# Altium PCB SFCslaver.PcbDoc (part 5 of 6)
Units mm, origin at the board's own origin, x right, y up, seen from the top; angles counter-clockwise.
Board outline 149.66 x 75.74 mm, 2 copper layers (Top Layer, Bottom Layer); 284 components, 212 nets, 830 pads, 310 vias.
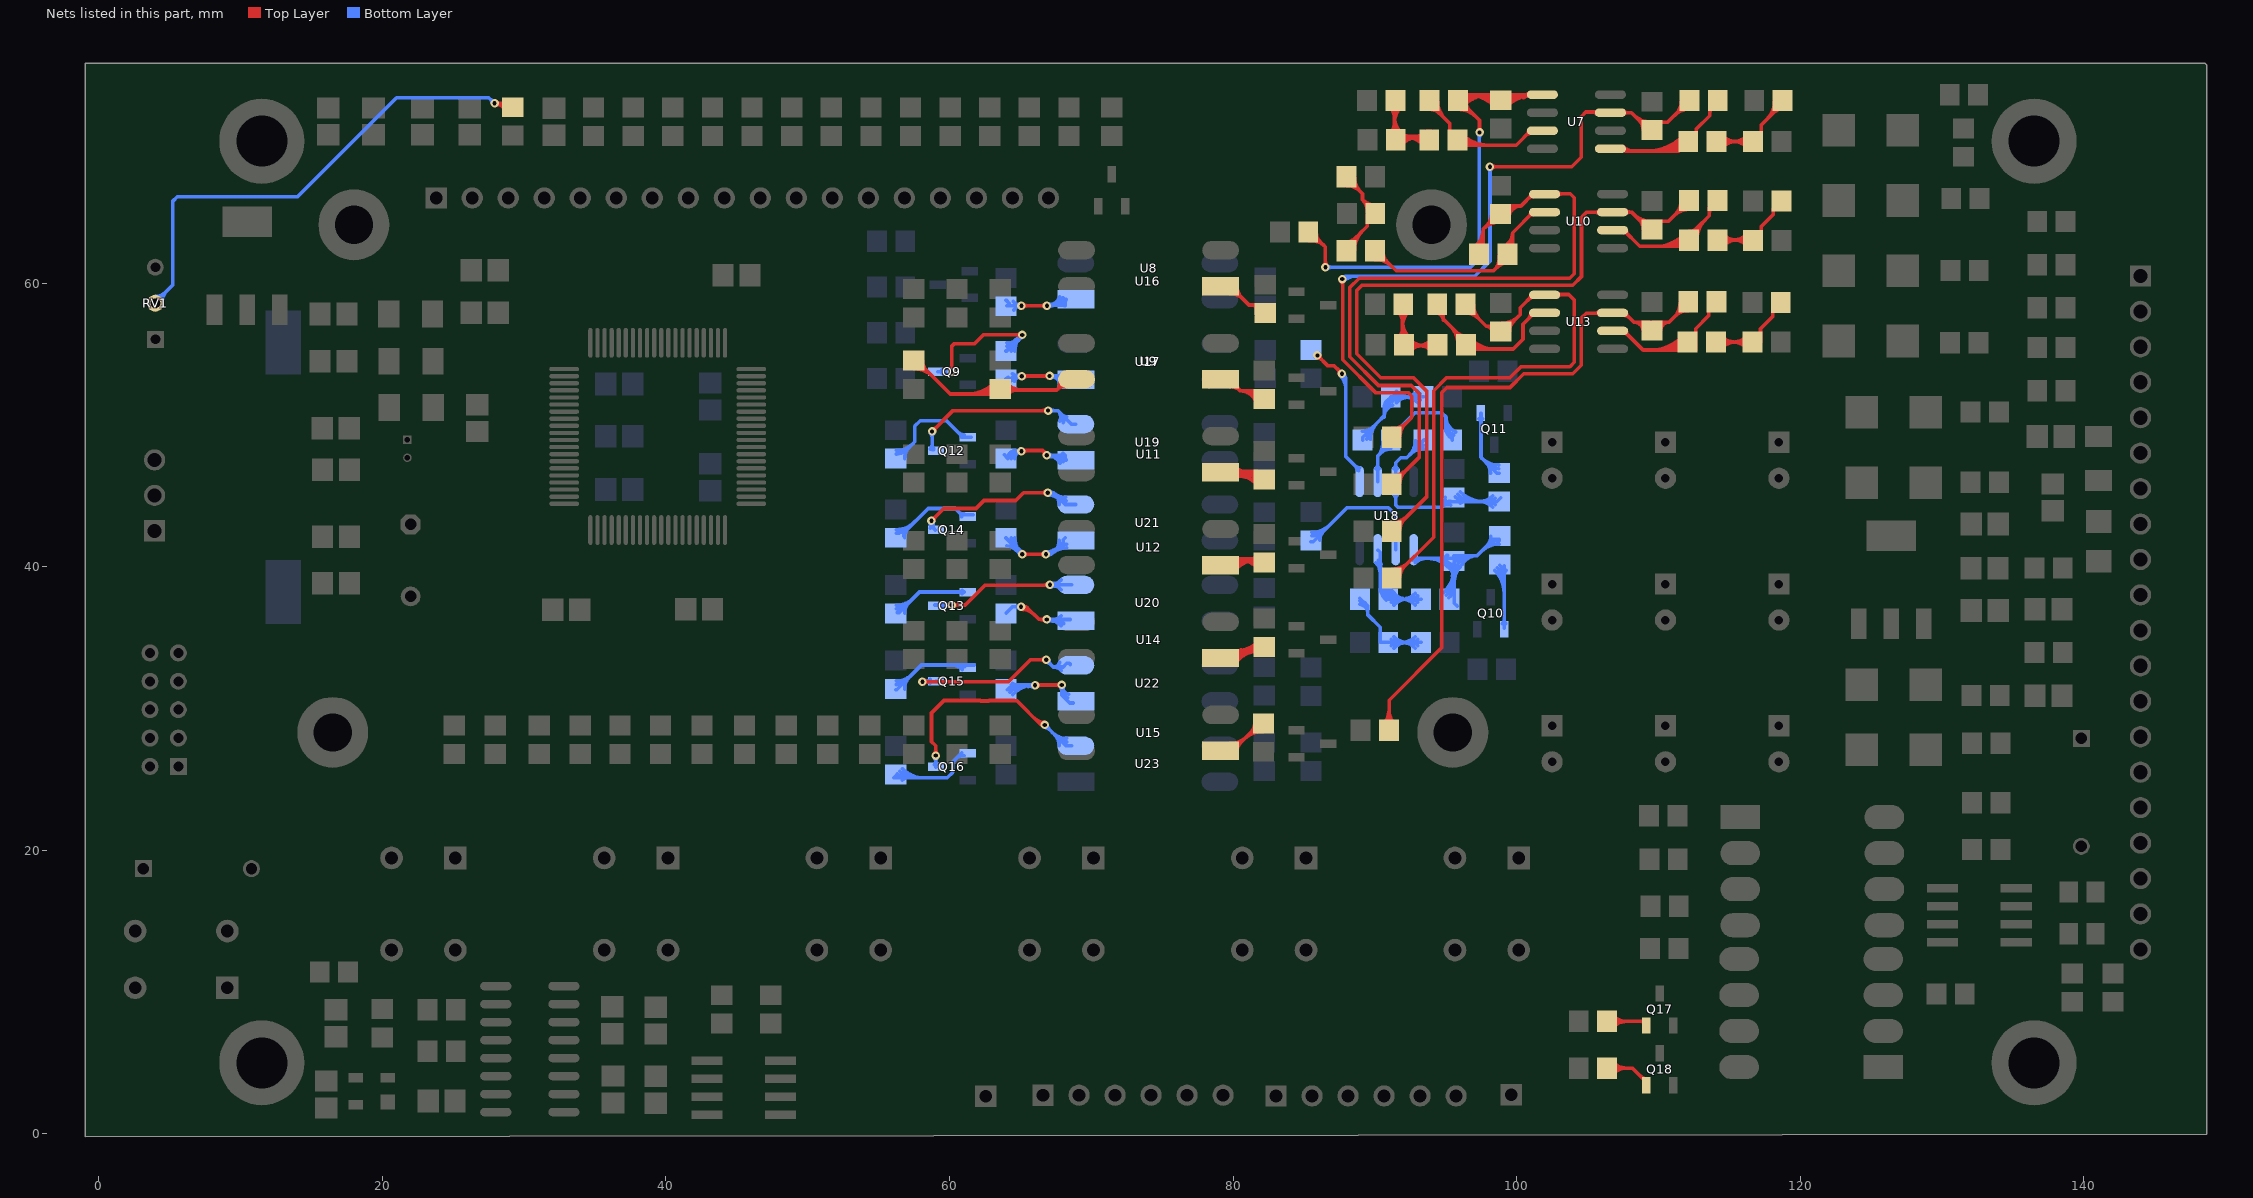
[diagram p5: the nets of this part, all layers, seen from the top]

## Via types
v1: diameter 0.6, hole 0.3, Top Layer to Bottom Layer, 310 vias

## Nets (pads, with @x,y where several pads share a name; then routed paths per layer and width w, separated by ;. In a path a pad name is that pad's centre, name@x,y a point inside that pad or via, vN(x,y) a via of type N, cw(c..) or ccw(c..) an arc to the next point about the centre after c; other vN are vias at no path point) (continued)
NetQ9_3: Q9.3 R106.1 | length 17.5
  Top Layer w0.254: v1@60.025,53.869 ccw(c59.73,54.164) 60.147,54.164 ccw(c60.565,54.164) v1@60.27,53.869 ; v1(60.147,53.746) 60.147,55.524 60.35,55.728 61.773,55.728 62.382,56.337 v1@65.1,56.337 ; v1@65.003,56.215 ccw(c64.708,55.92) 64.708,56.337 ccw(c64.708,56.755) v1@65.003,56.46
  Bottom Layer w0.254: Q9.3@59.176,53.746 v1(60.147,53.746) ; Q9.3@59.447,53.635 cw(c59.715,53.368) 59.715,53.746 ; Q9.3@59.447,53.88 ccw(c59.77,54.203) 59.77,53.746 ; v1@60.025,53.624 ccw(c59.73,53.329) 59.73,53.746 ccw(c59.73,54.164) v1@60.025,53.869 ; R106.1@63.984,55.208 64.022,55.208 65.126,56.312 v1(65.126,56.337) v1@65.126,56.363 ; R106.1@64.034,55.527 ccw(c64.034,56.266) R106.1@64.557,55.743 ; R106.1@64.034,55.781 ccw(c64.034,57.133) v1@64.991,56.177 ; R106.1@64.353,55.208 cw(c65.154,55.208) R106.1@64.588,55.774 ; R106.1@64.607,55.208 cw(c66.022,55.208) v1@65.022,56.208 ; 64.65,55.98 ccw(c64.32,56.553) v1@64.958,56.382 ; 64.812,55.999 ccw(c64.474,56.337) v1@64.953,56.337 ; 64.864,55.935 cw(c65.301,55.683) v1@65.17,56.17 ; 64.874,56.06 cw(c65.126,55.808) v1@65.126,56.164 ; 64.925,56.041 ccw(c64.639,56.207) v1@64.958,56.292
NetQ10_1: Q10.1 R37.1 | length 9.4
  Bottom Layer w0.254: R37.1@98.451,39.743 cw(c96.833,38.125) 99.121,38.125 ; R37.1@98.63,39.922 cw(c97.446,38.738) 99.121,38.738 ; R37.1@98.81,40.102 cw(c98.059,39.351) 99.121,39.351 ; Q10.1@98.999,35.975 ccw(c98.703,36.271) 99.121,36.271 ccw(c99.539,36.271) Q10.1@99.243,35.975 ; Q10.1@99.121,35.653 R37.1@99.121,40.041 ; 99.121,39.404 cw(c99.6,39.404) R37.1@99.261,39.743
NetQ11_1: Q11.1 R38.2 | length 8.6
  Bottom Layer w0.254: Q11.1@97.349,50.44 cw(c97.019,50.11) 97.485,50.11 ; 97.485,50.179 cw(c97.854,50.179) Q11.1@97.593,50.44 ; Q11.1@97.485,50.825 97.485,47.701 98.593,46.593 R38.2@98.781,46.593 ; 97.518,47.668 ccw(c98.731,48.881) R38.2@98.731,47.166 ; 97.849,47.337 cw(c97.105,46.593) R38.2@98.158,46.593 ; 97.952,47.235 ccw(c98.731,48.013) R38.2@98.731,46.912
NetQ12_1: Q12.1 R122.2 | length 10.8
  Bottom Layer w0.254: R122.2@56.262,47.939 ccw(c56.262,48.995) 57.009,48.248 ; R122.2@56.262,48.193 ccw(c56.262,49.862) 57.442,48.682 ; R122.2@56.835,47.62 cw(c57.932,47.62) 57.156,48.396 ; R122.2@56.872,47.705 56.872,48.112 57.556,48.796 57.556,49.911 57.937,50.292 59.792,50.292 60.956,49.128 Q12.1@61.544,49.128 ; 60.626,49.458 ccw(c61.024,49.857) Q12.1@61.024,49.293 ; Q12.1@60.772,49.312 cw(c60.58,49.12) Q12.1@60.851,49.12
NetQ12_3: Q12.3 U19.2 | length 17.6
  Top Layer w0.254: v1(58.776,49.53) 60.249,51.003 v1@66.98,51.003 ; v1@58.776,49.703 ccw(c58.776,50.121) 59.071,49.825 ccw(c59.366,49.53) v1@58.949,49.53 ; v1@66.832,50.881 ccw(c66.537,50.586) 66.537,51.003 ccw(c66.537,51.421) v1@66.832,51.126
  Bottom Layer w0.254: Q12.3@58.652,48.292 ccw(c58.354,48.59) 58.776,48.59 ; v1@58.653,49.408 cw(c58.358,49.112) 58.776,49.112 cw(c59.193,49.112) v1@58.898,49.408 ; 58.776,48.585 ccw(c59.189,48.585) Q12.3@58.897,48.292 ; v1(58.776,49.53) 58.776,48.26 58.801,48.235 Q12.3@58.9,48.235 ; v1(66.954,51.003) 67.646,51.003 ; v1@67.077,50.881 cw(c67.372,50.586) 67.372,51.003 cw(c67.372,51.421) v1@67.077,51.126 ; U19.2@67.784,50.263 ccw(c67.176,50.533) 67.646,51.003 ; 67.908,50.741 cw(c67.538,50.372) U19.2@68.016,50.16 ; 67.944,50.705 ccw(c68.262,51.023) U19.2@68.262,50.574 ; U19.2@68.887,50.042 68.607,50.042 67.646,51.003
NetQ13_1: Q13.1 R123.2 | length 9
  Bottom Layer w0.254: R123.2@56.262,37.017 ccw(c56.262,38.073) 57.009,37.326 ; R123.2@56.262,37.271 ccw(c56.262,38.94) 57.442,37.76 ; R123.2@56.314,36.758 56.441,36.758 57.888,38.206 Q13.1@61.053,38.206 ; R123.2@56.835,36.698 cw(c57.932,36.698) 57.156,37.474 ; 60.587,38.206 cw(c60.587,37.761) Q13.1@60.902,38.075 ; 60.626,38.206 ccw(c60.626,38.596) Q13.1@60.902,38.32
NetQ13_3: Q13.3 U20.2 | length 16.7
  Top Layer w0.254: v1(60.147,37.287) 61.11,37.287 62.507,38.684 63.246,38.684 63.25,38.688 v1@67.134,38.688 ; v1@60.27,37.165 cw(c60.565,36.87) 60.565,37.287 cw(c60.565,37.705) v1@60.27,37.41 ; 66.604,38.688 ccw(c66.604,39.193) v1@66.961,38.836 ; 66.727,38.688 cw(c66.727,38.357) v1@66.961,38.591
  Bottom Layer w0.254: Q13.3@58.953,37.262 58.979,37.287 v1(60.147,37.287) ; Q13.3@59.447,37.125 cw(c59.837,36.735) 59.837,37.287 ; Q13.3@59.447,37.37 ccw(c59.647,37.57) 59.647,37.287 ; v1@60.025,37.165 ccw(c59.73,36.87) 59.73,37.287 ccw(c59.73,37.705) v1@60.025,37.41 ; v1@67.17,38.564 cw(c67.379,38.202) 67.487,38.606 cw(c67.595,39.009) v1@67.233,38.8 ; v1@67.17,38.864 ccw(c67.379,39.225) 67.487,38.822 ccw(c67.595,38.418) v1@67.233,38.627 ; v1@67.206,38.591 cw(c67.501,38.296) 67.501,38.714 cw(c67.501,39.131) v1@67.206,38.836 ; U20.2@67.87,38.359 ccw(c67.083,37.664) v1(67.083,38.714) ; U20.2@67.878,39.061 cw(c67.083,39.798) v1(67.083,38.714) ; U20.2@68.633,38.714 v1(67.083,38.714)
NetQ14_1: Q14.1 R128.2 | length 9.8
  Bottom Layer w0.254: R128.2@56.262,42.351 ccw(c56.262,43.529) 57.095,42.696 ; R128.2@56.262,42.605 ccw(c56.262,44.397) 57.529,43.13 ; R128.2@56.796,42.143 56.796,42.397 58.494,44.094 60.401,44.094 60.829,43.667 Q14.1@61.671,43.667 ; R128.2@56.835,42.032 cw(c57.81,42.032) 57.121,42.721 ; 60.626,43.87 ccw(c61.024,44.269) Q14.1@61.024,43.705 ; Q14.1@60.772,43.724 cw(c60.58,43.532) Q14.1@60.851,43.532
NetQ14_3: Q14.3 U21.2 | length 20.9
  Top Layer w0.254: v1@58.725,43.404 ccw(c58.725,43.821) 59.02,43.526 ccw(c59.315,43.231) v1@58.898,43.231 ; v1@58.727,43.233 59.593,44.099 61.876,44.099 62.435,44.657 64.673,44.657 65.227,45.212 v1(66.929,45.212) ; v1@66.807,45.09 ccw(c66.511,44.794) 66.511,45.212 ccw(c66.511,45.63) v1@66.807,45.334
  Bottom Layer w0.254: v1@58.611,43.101 cw(c58.392,42.85) Q14.3@58.725,42.85 ; v1@58.638,43.081 cw(c58.479,42.805) 58.787,42.887 ; v1@58.65,43.262 ccw(c59.009,43.114) Q14.3@58.734,42.84 ; Q14.3@58.652,42.704 ccw(c58.476,42.88) Q14.3@58.725,42.88 ; v1@58.725,43.119 ccw(c59.312,43.119) Q14.3@58.897,42.704 ; v1(58.725,43.231) Q14.3@58.725,42.85 ; Q14.3@58.79,42.874 cw(c59.034,42.939) v1@58.851,43.112 ; v1@58.839,43.101 ccw(c59.058,42.85) Q14.3@58.725,42.85 ; v1@58.885,43.165 ccw(c59.391,42.957) 59.004,42.57 Q14.3@58.725,42.85 ; v1@66.929,45.039 cw(c66.929,43.64) U21.2@67.918,44.629 ; v1@66.929,45.293 cw(c66.929,44.507) 67.484,45.063 ; v1@66.969,45.212 67.335,45.212 ; v1@67.054,45.092 cw(c67.335,44.821) 67.335,45.212 ; v1@67.054,45.332 ccw(c67.335,45.603) 67.335,45.212 ; 67.435,45.113 cw(c66.7,44.378) U21.2@67.739,44.378 ; 67.715,44.832 ccw(c68.173,45.289) U21.2@68.236,44.646 ; U21.2@68.211,44.898 cw(c68.105,45.981) 67.335,45.212 ; U21.2@68.887,44.378 68.169,44.378 67.335,45.212
NetQ15_1: Q15.1 R131.2 | length 10.4
  Bottom Layer w0.254: R131.2@56.212,31.322 56.288,31.322 58.026,33.06 Q15.1@61.732,33.06 ; R131.2@56.262,31.683 ccw(c56.262,32.616) R131.2@56.922,31.956 ; R131.2@56.262,31.937 ccw(c56.262,33.483) 57.356,32.39 ; R131.2@56.835,31.364 cw(c58.055,31.364) 57.192,32.227 ; 60.134,33.06 cw(c60.134,31.973) Q15.1@60.902,32.741 ; Q15.1@60.747,33.06 cw(c60.747,32.586) Q15.1@61.082,32.921
NetQ15_3: Q15.3 U22.2 | length 17.3
  Top Layer w0.254: v1(58.09,31.877) 64.16,31.877 65.71,33.426 v1@66.878,33.426 ; v1@58.212,31.755 cw(c58.507,31.459) 58.507,31.877 cw(c58.507,32.295) v1@58.212,31.999 ; v1@66.705,33.304 ccw(c66.41,33.009) 66.41,33.426 ccw(c66.41,33.844) v1@66.705,33.549
  Bottom Layer w0.254: v1@58.064,31.877 59.013,31.877 Q15.3@59.049,31.914 ; v1@58.212,31.755 cw(c58.507,31.459) 58.507,31.877 cw(c58.507,32.295) v1@58.212,31.999 ; v1@58.214,31.998 ccw(c58.396,32.175) 58.462,31.929 ; v1@58.24,31.791 cw(c58.465,31.66) 58.398,31.912 ; v1@58.268,31.877 ccw(c58.268,32.42) Q15.3@58.652,32.036 ; 58.446,31.877 cw(c58.446,31.585) Q15.3@58.652,31.791 ; v1@66.827,33.253 cw(c66.827,32.897) 67.079,33.149 ; v1@66.992,33.236 67.31,32.918 ; v1@67,33.426 ccw(c67.479,33.426) 67.141,33.088 ; U22.2@67.778,33.232 cw(c67.31,33.425) 67.31,32.918 ; U22.2@67.883,32.672 ccw(c67.31,32.128) 67.31,32.918 ; U22.2@68.531,33.126 68.531,33.075 68.434,33.172 68.275,33.172 68.021,32.918 67.31,32.918
  other v1: 66.827,33.426
NetQ16_1: Q16.1 R135.2 | length 11.1
  Bottom Layer w0.254: R135.2@56.301,25.315 56.085,25.099 59.844,25.099 60.225,25.48 60.225,26.217 Q16.1@60.86,26.852 ; R135.2@56.308,25.39 ccw(c57.009,26.091) 57.009,25.099 ; R135.2@56.488,25.57 ccw(c57.623,26.705) 57.623,25.099 ; R135.2@56.667,24.939 cw(c57.055,24.551) 57.055,25.099 ; R135.2@56.667,25.749 ccw(c58.236,27.318) 58.236,25.099 ; 60.435,26.427 cw(c61.024,25.838) Q16.1@61.024,26.671
NetQ16_3: Q16.3 U23.2 | length 21.5
  Top Layer w0.254: v1@58.907,26.792 ccw(c58.612,27.088) 59.03,27.088 ccw(c59.447,27.088) v1@59.152,26.792 ; v1(59.03,26.67) 59.03,27.356 58.736,27.65 58.736,29.679 59.608,30.551 62.173,30.551 62.206,30.519 62.762,30.519 62.795,30.551 64.549,30.551 64.552,30.549 64.752,30.549 66.446,28.854 v1@66.685,28.854 ; 65.997,29.304 ccw(c66.726,30.033) v1@66.726,29.002
  Bottom Layer w0.254: v1@58.907,26.548 cw(c58.612,26.252) 59.03,26.252 cw(c59.447,26.252) v1@59.152,26.548 ; Q16.3@58.927,26.016 ccw(c58.68,26.264) 59.03,26.264 ; Q16.3@59.03,25.857 v1(59.03,26.67) ; 59.03,26.359 ccw(c59.515,26.359) Q16.3@59.172,26.016 ; v1@66.726,28.656 cw(c66.726,28.238) 67.021,28.534 cw(c67.316,28.829) v1@66.899,28.829 ; v1@66.751,28.804 68.195,27.36 U23.2@68.607,27.36 ; 67.254,28.3 ccw(c68.262,29.308) U23.2@68.262,27.883 ; 67.417,28.138 cw(c66.639,27.36) U23.2@67.739,27.36 ; 67.688,27.867 ccw(c68.262,28.441) U23.2@68.262,27.629
  other v1: 66.726,28.829
NetQ17_1: Q17.1 R158.2 | length 6.5
  Top Layer w0.254: R158.2@106.386,7.925 Q17.1@108.89,7.925 ; R158.2@106.612,7.699 cw(c107.157,7.155) 107.157,7.925 cw(c107.157,8.695) R158.2@106.612,8.15 ; R158.2@106.792,7.52 cw(c107.77,6.541) 107.77,7.925 cw(c107.77,9.308) R158.2@106.792,8.33 ; 108.713,7.925 cw(c108.713,7.467) Q17.1@109.037,7.791 ; 108.77,7.925 ccw(c108.77,8.302) Q17.1@109.037,8.035
NetQ18_1: Q18.1 R160.2 | length 7.5
  Top Layer w0.254: R160.2@106.386,4.627 108.174,4.627 109.195,3.607 Q18.1@109.195,3.378 ; R160.2@106.612,4.401 cw(c107.157,3.857) 107.157,4.627 cw(c107.157,5.397) R160.2@106.612,4.853 ; R160.2@106.792,4.222 cw(c107.77,3.244) 107.77,4.627 cw(c107.77,6.01) R160.2@106.792,5.032 ; 108.771,4.03 ccw(c109.159,4.418) Q18.1@109.159,3.87 ; Q18.1@108.902,3.899 cw(c108.699,3.697) Q18.1@108.986,3.697
NetR13_1: R13.1 RV1.2 | length 41.3
  Top Layer w0.254: v1@28.007,72.523 cw(c28.202,72.213) 28.297,72.567 cw(c28.392,72.921) v1@28.068,72.75 ; v1@28.037,72.547 cw(c28.332,72.252) 28.332,72.669 cw(c28.332,73.087) v1@28.037,72.792 ; 28.289,72.669 cw(c28.289,72.054) R13.1@28.861,72.281 ; 28.426,72.669 ccw(c28.426,73.131) R13.1@28.752,72.805 ; R13.1@28.625,72.187 ccw(c27.915,71.905) v1(27.915,72.669) R13.1@29.388,72.669
  Bottom Layer w0.254: RV1.2@3.937,58.572 5.232,59.868 5.232,65.786 5.537,66.091 14.021,66.091 21.006,73.076 27.508,73.076 v1(27.915,72.669) ; RV1.2@3.988,59.045 ccw(c3.988,60.065) 4.709,59.344 ; RV1.2@4.207,58.572 cw(c4.858,58.572) 4.398,59.033 ; RV1.2@4.461,58.572 cw(c5.725,58.572) 4.831,59.467 ; v1@27.742,72.669 ccw(c27.324,72.669) 27.619,72.965 ccw(c27.915,73.26) v1@27.915,72.842
NetR19_1: R19.1 R48.1 R50.2 U7.1 | length 57.2
  Top Layer w0.254: R19.1@85.319,63.754 86.512,62.56 ; R19.1@85.331,63.234 cw(c85.42,62.236) 86.128,62.945 ; R19.1@85.354,62.981 cw(c85.483,61.531) 86.512,62.56 ; R19.1@85.876,63.552 ccw(c86.732,63.552) 86.126,62.946 ; v1@86.39,61.235 ccw(c86.095,61.53) 86.512,61.53 ccw(c86.93,61.53) v1@86.635,61.235 ; v1@86.42,61.112 86.512,61.205 86.512,62.56 ; v1@86.487,61.087 v1(86.512,61.112) v1@86.525,61.125 ; R48.1@95.785,73.283 R48.1@96.023,73.283 ; R48.1@95.867,72.25 cw(c95.867,70.462) 97.131,71.726 ; R48.1@95.867,72.504 cw(c95.867,71.329) 96.697,72.16 ; R48.1@95.896,73.41 R48.1@96.023,73.283 ; R48.1@95.913,72.877 cw(c96.894,71.895) 96.894,73.283 ; R48.1@96.092,72.697 cw(c97.507,71.282) 97.507,73.283 ; R48.1@96.272,72.517 cw(c98.121,70.669) 98.121,73.283 ; R48.1@96.44,72.823 ccw(c97.418,72.823) 96.726,72.131 ; R48.1@96.492,73.283 cw(c96.492,70.544) R50.2@98.429,72.481 ; 97.105,73.283 cw(c97.105,71.158) R50.2@98.608,72.661 ; v1@97.263,70.739 ccw(c96.968,71.034) 97.385,71.034 ccw(c97.803,71.034) v1@97.508,70.739 ; v1@97.385,70.591 v1(97.385,70.616) 97.385,71.471 96.023,72.834 R48.1@96.023,73.283 ; 97.719,73.283 cw(c97.719,71.771) R50.2@98.788,72.84 ; R50.2@98.98,72.84 cw(c100.049,71.771) 100.049,73.283 ; R50.2@99.16,72.661 cw(c100.663,71.158) 100.663,73.283 ; R50.2@99.339,72.481 cw(c101.276,70.544) U7.1@101.276,73.283 ; 100.482,73.086 ccw(c100.33,73.697) U7.1@100.87,73.372 ; U7.1@100.896,73.161 ccw(c100.6,72.866) 100.6,73.283 ccw(c100.6,73.701) U7.1@100.896,73.406 ; U7.1@101.818,73.283 R48.1@96.023,73.283
  Bottom Layer w0.254: v1(86.512,61.112) 96.774,61.112 97.372,61.71 97.372,70.603 v1(97.385,70.616) v1@97.385,70.642 ; v1@86.635,60.99 cw(c86.93,60.695) 86.93,61.112 cw(c86.93,61.53) v1@86.635,61.235 ; v1@97.263,70.494 cw(c97,70.231) 97.372,70.231 ; 97.372,70.166 cw(c97.835,70.166) v1@97.508,70.494
NetR20_1: R20.1 R49.2 R51.1 U7.7 | length 66.9
  Top Layer w0.254: v1@87.584,60.152 cw(c87.227,59.795) 87.732,59.795 ; 87.732,59.918 cw(c88.063,59.918) v1@87.829,60.152 ; v1@87.732,60.274 87.732,54.591 90.05,52.273 92.354,52.273 92.608,52.019 92.608,50.521 R20.1@91.211,49.124 ; R20.1@91.195,49.486 ccw(c91.195,50.4) R20.1@91.842,49.754 ; R20.1@91.195,49.74 ccw(c91.195,51.268) 92.275,50.188 ; R20.1@91.768,49.167 cw(c93.008,49.167) 92.131,50.044 ; 98.857,68.199 v1(98.12,68.199) 103.884,68.199 104.548,68.864 104.548,71.731 104.881,72.064 U7.7@105.793,72.064 ; 105.278,72.064 cw(c105.278,71.473) U7.7@105.696,71.891 ; U7.7@106.618,72.013 108.096,72.013 108.76,71.349 ; U7.7@107.54,71.891 cw(c107.836,71.596) 107.836,72.013 cw(c107.836,72.431) U7.7@107.54,72.136 ; 108.231,71.878 ccw(c109.498,73.145) R51.1@109.498,71.353 ; 108.639,71.47 cw(c107.95,70.78) R51.1@108.925,70.78 ; 108.664,71.445 ccw(c109.498,72.278) R51.1@109.498,71.099 ; R51.1@108.929,70.853 ccw(c108.341,70.929) 108.76,71.349 ; R51.1@109.222,71.283 cw(c109.035,71.623) 108.76,71.349 ; 111.137,71.82 cw(c112.184,70.772) R49.2@112.184,72.254 ; 111.235,71.918 ccw(c110.326,72.827) R49.2@111.611,72.827 ; R49.2@111.57,72.254 cw(c112.184,71.64) R49.2@112.184,72.508 ; R49.2@111.668,72.352 ccw(c111.193,72.827) R49.2@111.865,72.827 ; R49.2@112.321,73.461 112.321,73.004 110.665,71.349 108.76,71.349 ; 98.538,68.199 ccw(c98.538,67.781) 98.243,68.077 cw(c98.538,67.781) 98.538,68.199 ; 98.538,68.199 cw(c98.538,68.617) 98.243,68.321 ccw(c98.538,68.617) 98.538,68.199
  Bottom Layer w0.254: v1@87.649,60.331 cw(c88.001,59.979) 88.001,60.477 ; v1@87.694,60.287 87.719,60.287 87.909,60.477 97.051,60.477 98.12,61.547 v1@98.12,68.174 ; v1@87.829,60.152 cw(c88.614,59.366) 88.614,60.477 ; v1@97.998,68.077 cw(c97.703,67.781) 98.12,67.781 cw(c98.538,67.781) v1@98.243,68.077
  other v1: 87.706,60.274
NetR21_1: R21.1 R69.2 R71.2 U10.1 | length 63.2
  Top Layer w0.254: R21.1@91.195,46.178 ccw(c91.195,47.138) R21.1@91.874,46.459 ; R21.1@91.195,46.432 ccw(c91.195,48.005) 92.308,46.893 ; R21.1@91.211,45.796 93.144,47.728 93.144,52.19 92.561,52.772 90.256,52.772 88.231,54.798 88.231,59.681 88.891,60.341 103.75,60.341 104.066,60.657 104.066,66.019 103.786,66.298 U10.1@102.516,66.298 ; R21.1@91.768,45.859 cw(c92.962,45.859) 92.118,46.703 ; R69.2@97.004,62.535 ccw(c96.048,63.807) 97.639,63.807 ; R69.2@97.157,62.332 ccw(c96.431,63.298) 97.639,63.298 ; R69.2@97.31,62.129 ccw(c96.813,62.789) 97.639,62.789 ; R69.2@97.639,62.31 97.639,63.807 ; R69.2@97.639,62.759 ccw(c98.031,62.759) R69.2@97.754,62.482 ; 97.908,64.075 ccw(c97.12,64.862) R71.2@98.234,64.862 ; 98.072,64.24 cw(c98.805,63.507) R71.2@98.806,64.543 ; R71.2@98.722,64.9 cw(c99.37,64.768) R71.2@99.37,65.43 ; R71.2@98.806,64.289 ccw(c98.804,62.642) 97.639,63.807 ; R71.2@98.971,64.849 cw(c99.681,64.705) 99.681,65.43 ; R71.2@99.219,64.799 cw(c99.992,64.643) 99.992,65.43 ; R71.2@99.468,64.749 cw(c100.302,64.58) 100.302,65.43 ; 100.831,65.959 cw(c101.17,65.62) U10.1@101.17,66.1 ; 100.893,66.022 ccw(c100.642,66.273) U10.1@100.997,66.273 ; U10.1@101.97,66.273 101.145,66.273 100.302,65.43 ; U10.1@102.893,66.15 cw(c103.249,65.794) 103.249,66.298 ; U10.1@102.893,66.395 ccw(c103.127,66.629) 103.127,66.298 ; 97.639,63.807 99.263,65.43 100.302,65.43
NetR22_1: R22.1 R70.2 R72.1 U10.7 | length 62.9
  Top Layer w0.254: R22.1@91.195,42.87 ccw(c91.195,43.876) 91.907,43.164 ; R22.1@91.195,43.124 ccw(c91.195,44.743) 92.34,43.598 ; R22.1@91.211,42.469 93.65,44.907 93.65,52.389 92.724,53.315 90.42,53.315 88.73,55.005 88.73,59.474 89.098,59.842 103.957,59.842 104.574,60.459 104.574,64.647 104.904,64.977 U10.7@106.783,64.977 ; R22.1@91.768,42.551 cw(c92.916,42.551) 92.104,43.362 ; 105.491,64.977 ccw(c105.491,65.482) U10.7@105.848,65.125 ; 105.614,64.977 cw(c105.614,64.646) U10.7@105.848,64.88 ; U10.7@106.77,65.003 108.104,65.003 108.765,64.342 ; U10.7@107.693,64.88 cw(c107.988,64.585) 107.988,65.003 cw(c107.988,65.42) U10.7@107.693,65.125 ; 108.235,64.872 ccw(c109.502,66.139) R72.1@109.502,64.347 ; 108.643,64.464 cw(c107.954,63.774) R72.1@108.929,63.774 ; 108.669,64.438 ccw(c109.502,65.272) R72.1@109.502,64.093 ; R72.1@108.934,63.847 ccw(c108.345,63.923) 108.765,64.342 ; R72.1@109.226,64.277 cw(c109.039,64.617) 108.765,64.342 ; R72.1@109.552,63.774 109.552,64.292 109.577,64.317 109.603,64.317 109.628,64.342 110.695,64.342 R70.2@112.219,65.866 ; R72.1@109.577,64.342 108.765,64.342 ; 111.111,64.759 cw(c112.159,63.711) R70.2@112.159,65.193 ; 111.209,64.857 ccw(c110.3,65.766) R70.2@111.586,65.766 ; R70.2@111.545,65.192 cw(c112.159,64.578) R70.2@112.159,65.447 ; R70.2@111.643,65.29 ccw(c111.168,65.766) R70.2@111.84,65.766
NetR23_1: R23.1 R91.2 R93.2 U13.1 | length 50.6
  Top Layer w0.254: R23.1@91.195,39.561 ccw(c91.195,40.613) 91.939,39.869 ; R23.1@91.195,39.815 ccw(c91.195,41.481) 92.373,40.303 ; R23.1@91.57,39.5 94.149,42.079 94.149,52.411 95.043,53.306 99.508,53.306 100.305,54.102 103.759,54.102 104.066,54.409 104.066,58.805 103.685,59.186 U13.1@102.465,59.186 ; R23.1@91.768,39.242 cw(c92.87,39.242) 92.091,40.021 ; R91.2@96.141,58.678 97.868,56.951 ; R91.2@96.402,57.873 cw(c96.402,56.561) 97.33,57.489 ; R91.2@96.402,58.127 cw(c96.402,57.429) R91.2@96.896,57.923 ; R91.2@96.721,58.446 ccw(c97.563,58.446) R91.2@96.968,57.851 ; R91.2@96.975,58.446 ccw(c98.43,58.446) 97.401,57.418 ; 98.13,56.951 cw(c98.13,56.565) R93.2@98.515,56.577 ; R93.2@98.261,56.569 ccw(c97.868,56.558) 97.868,56.951 ; R93.2@98.934,56.905 ccw(c98.934,58.022) 99.724,57.232 ; R93.2@98.934,57.159 ccw(c98.934,58.89) 100.158,57.666 ; R93.2@99.507,56.586 cw(c100.543,56.586) 99.81,57.319 ; 100.874,58.865 cw(c101.17,58.569) U13.1@101.17,58.988 ; 100.875,58.866 ccw(c100.581,59.161) U13.1@100.997,59.161 ; U13.1@101.97,59.161 101.945,59.186 101.195,59.186 100.256,58.246 100.256,57.764 99.443,56.951 97.868,56.951 ; U13.1@102.893,59.038 cw(c103.249,58.682) 103.249,59.186 ; U13.1@102.893,59.283 ccw(c103.127,59.517) 103.127,59.186
NetR24_1: R24.1 R92.2 R94.1 U13.7 | length 60.8
  Top Layer w0.254: R24.1@90.587,28.903 ccw(c89.57,29.92) 91.008,29.92 ; R24.1@90.767,28.724 ccw(c90.183,29.307) 91.008,29.307 ; R24.1@91.008,28.473 91.008,30.582 94.717,34.29 94.717,52.273 95.072,52.629 99.537,52.629 100.511,53.603 103.966,53.603 104.565,54.202 104.565,57.526 104.904,57.865 U13.7@106.225,57.865 ; 91.008,29.23 ccw(c91.724,29.23) R24.1@91.218,28.724 ; 91.008,29.843 ccw(c92.337,29.843) R24.1@91.397,28.903 ; 105.491,57.865 ccw(c105.491,58.37) U13.7@105.848,58.013 ; 105.614,57.865 cw(c105.614,57.534) U13.7@105.848,57.768 ; U13.7@106.77,57.891 107.622,57.891 108.282,57.23 ; U13.7@107.57,57.718 cw(c107.57,57.177) 107.953,57.559 ; U13.7@107.743,57.891 ccw(c108.037,57.891) 107.83,57.683 ; 108.554,57.23 cw(c108.554,56.599) R94.1@109.184,56.641 ; R94.1@108.825,57.23 cw(c108.825,56.617) R94.1@109.437,56.658 ; R94.1@108.93,56.624 ccw(c108.282,56.581) 108.282,57.23 ; R94.1@109.4,57.23 108.282,57.23 ; R94.1@109.552,57.23 110.746,57.23 ; R94.1@109.667,56.662 cw(c110.237,56.661) R94.1@110.237,57.23 ; R94.1@109.921,56.661 cw(c110.491,56.66) 110.491,57.23 ; R94.1@110.175,56.661 cw(c110.746,56.66) 110.746,57.23 ; 111.105,57.589 ccw(c110.066,58.628) R92.2@111.535,58.628 ; 111.191,57.675 cw(c112.108,56.758) R92.2@112.108,58.055 ; R92.2@111.538,58.023 ccw(c110.933,58.628) R92.2@111.789,58.628 ; R92.2@111.624,58.109 cw(c112.108,57.625) R92.2@112.108,58.309 ; R92.2@112.168,58.653 110.746,57.23
NetR35_2: R35.2 U18.2 | length 13.4
  Bottom Layer w0.254: R35.2@85.496,41.758 85.649,41.758 88.036,44.145 90.957,44.145 91.467,43.635 U18.2@91.467,41.191 ; R35.2@85.546,42.169 ccw(c85.546,43.409) 86.423,42.532 ; R35.2@85.546,42.423 ccw(c85.546,44.276) 86.857,42.966 ; R35.2@86.119,41.85 cw(c87.033,41.85) 86.387,42.496 ; U18.2@91.345,42.113 ccw(c91.05,42.408) 91.467,42.408 ccw(c91.885,42.408) U18.2@91.59,42.113
NetR36_1: R36.1 U18.5 | length 13.8
  Top Layer w0.254: v1@85.941,54.902 86.69,54.153 87.147,54.153 v1@87.655,53.645 ; v1@85.954,54.716 cw(c85.954,54.299) 86.249,54.594 cw(c86.544,54.889) v1@86.127,54.889 ; 87.368,53.933 cw(c87.029,53.594) v1@87.508,53.594 ; 87.429,53.871 ccw(c87.681,54.123) v1@87.681,53.767
  Bottom Layer w0.254: v1@87.558,53.472 cw(c86.589,52.502) 87.96,52.502 ; v1@87.668,53.581 87.96,53.289 ; v1@87.681,53.421 cw(c87.681,53.065) 87.933,53.317 ; v1@87.738,53.651 cw(c87.202,53.115) 87.96,53.115 ; v1@87.853,53.58 ccw(c88.221,53.55) 87.96,53.289 ; 88.622,47.09 ccw(c88.927,47.395) U18.5@88.927,46.964 ; 88.636,47.076 cw(c88.35,46.791) U18.5@88.754,46.791 ; U18.5@88.862,46.749 88.862,46.85 87.96,47.752 87.96,53.289
  other v1: 87.681,53.594 85.954,54.889
NetR37_2: R37.2 R116.2 R118.2 U18.1 | length 30.5
  Bottom Layer w0.254: U18.1@92.68,40.448 cw(c93.009,40.119) U18.1@93.009,40.584 ; U18.1@92.772,40.584 95.607,40.584 95.607,37.418 R116.2@95.811,37.215 ; U18.1@92.86,40.268 cw(c93.622,39.506) 93.622,40.584 ; 93.707,40.584 cw(c93.707,38.579) R118.2@95.125,39.997 ; 94.321,40.584 cw(c94.321,39.192) R118.2@95.305,40.176 ; 94.586,40.584 ccw(c94.586,41.346) R118.2@95.125,40.807 ; R116.2@94.856,38.153 ccw(c93.042,39.967) R118.2@95.607,39.967 ; R116.2@95.036,37.973 ccw(c93.655,39.354) 95.607,39.354 ; R116.2@95.215,37.794 ccw(c94.268,38.741) 95.607,38.741 ; R118.2@95.225,39.997 cw(c94.302,39.074) 95.607,39.074 ; R118.2@95.228,39.915 cw(c94.936,39.445) 95.478,39.334 ; R118.2@95.362,40.131 cw(c95.141,39.775) 95.551,39.692 ; R118.2@95.405,40.176 cw(c94.915,39.687) 95.607,39.687 ; 95.491,39.399 cw(c96.302,39.233) R118.2@95.846,39.924 ; R118.2@95.58,40.767 97.206,40.767 ; 95.607,38.964 cw(c97.069,38.964) R118.2@96.035,39.997 ; 95.607,39.577 cw(c96.455,39.577) R118.2@95.856,40.176 ; R118.2@95.687,40.371 cw(c96.352,40.01) 96.352,40.767 ; R118.2@95.911,40.25 cw(c96.779,39.779) 96.779,40.767 ; R118.2@96.134,40.129 cw(c97.206,39.548) 97.206,40.767 ; 97.489,41.05 cw(c98.756,39.783) R37.2@98.756,41.575 ; 97.897,41.459 ccw(c97.208,42.148) R37.2@98.183,42.148 ; 97.923,41.484 cw(c98.756,40.65) R37.2@98.756,41.829 ; R37.2@98.755,41.919 98.358,41.919 97.206,40.767
NetR38_1: R38.1 R117.2 R119.2 U18.7 | length 27.2
  Bottom Layer w0.254: U18.7@91.345,45.068 cw(c91.05,44.773) 91.467,44.773 cw(c91.885,44.773) U18.7@91.59,45.068 ; U18.7@91.345,46.913 ccw(c91.05,47.208) 91.467,47.208 ccw(c91.885,47.208) U18.7@91.59,46.913 ; U18.7@91.467,45.191 91.467,44.341 91.633,44.175 94.67,44.175 ; U18.7@91.467,45.991 91.467,47.322 91.821,47.676 92.253,47.676 92.972,48.395 92.972,48.423 R117.2@93.474,48.925 ; 92.452,47.875 ccw(c91.452,48.875) R117.2@92.866,48.875 ; 92.482,47.905 cw(c93.439,46.949) R117.2@93.439,48.302 ; R117.2@92.886,48.309 ccw(c92.319,48.875) R117.2@93.12,48.875 ; R117.2@92.916,48.339 cw(c93.439,47.816) R117.2@93.439,48.556 ; R119.2@94.958,44.462 cw(c95.279,44.141) R119.2@95.426,44.571 ; R119.2@94.957,44.871 cw(c93.977,44.868) 94.67,44.175 ; R119.2@95.344,44.331 ccw(c95.132,43.713) 94.67,44.175 ; R119.2@95.676,44.918 ccw(c96.5,45.742) 96.5,44.577 ; R119.2@95.856,45.098 ccw(c97.113,46.356) 97.113,44.577 ; R119.2@96.035,44.467 cw(c96.3,44.202) R119.2@96.3,44.577 ; R119.2@96.035,45.278 ccw(c97.727,46.969) 97.727,44.577 ; 97.309,44.577 ccw(c97.309,46.015) R38.1@98.325,44.998 ; 97.386,44.577 cw(c97.386,43.248) R38.1@98.325,44.188 ; 97.922,44.577 ccw(c97.922,45.402) R38.1@98.505,44.819 ; 97.999,44.577 cw(c97.999,43.861) R38.1@98.505,44.367 ; R38.1@98.882,44.856 98.603,44.577 95.072,44.577 94.67,44.175
NetR42_2: R42.2 R44.1 R46.1 | length 19
  Top Layer w0.254: R44.1@91.044,72.417 cw(c90.211,71.585) 91.389,71.585 ; R42.2@91.07,70.559 ccw(c90.298,71.331) 91.389,71.331 ; R42.2@91.213,70.362 R46.1@93.896,70.362 ; R42.2@91.389,70.667 91.389,72.801 R44.1@91.747,72.801 ; 91.389,71.131 ccw(c92.452,71.131) R42.2@91.7,70.38 ; 91.389,71.294 cw(c92.978,71.294) R44.1@91.855,72.417 ; 91.389,71.744 ccw(c93.065,71.744) 91.88,70.559 ccw(c92.355,71.035) 92.355,70.362 ; 91.389,71.907 cw(c92.365,71.907) R44.1@91.675,72.597 ; R42.2@91.7,69.928 cw(c92.748,68.881) 92.748,70.362 ; R42.2@91.88,69.749 cw(c93.361,68.268) R46.1@93.361,70.362 ; R42.2@91.894,70.362 cw(c91.894,68.181) R46.1@93.436,69.723 ; 92.507,70.362 cw(c92.507,68.795) R46.1@93.616,69.903 ; 93.022,70.362 ccw(c93.022,70.948) R46.1@93.436,70.534 ; 93.12,70.362 cw(c93.12,69.408) R46.1@93.795,70.083 ; R46.1@93.626,70.692 R46.1@94.007,70.692
NetR43_2: R43.2 R45.1 R47.1 | length 16.8
  Top Layer w0.254: R47.1@114.108,69.981 R43.2@116.68,69.981 ; R47.1@114.334,69.756 cw(c114.878,69.211) 114.878,69.981 cw(c114.878,70.751) R47.1@114.334,70.207 ; R47.1@114.513,69.576 cw(c115.491,68.598) 115.491,69.981 cw(c115.491,71.365) R47.1@114.513,70.386 ; R43.2@116.275,69.576 ccw(c115.297,68.598) 115.297,69.981 ccw(c115.297,71.365) R43.2@116.275,70.386 ; R43.2@116.454,69.756 ccw(c115.91,69.211) 115.91,69.981 ccw(c115.91,70.751) R43.2@116.454,70.207 ; R43.2@116.685,69.952 117.244,70.51 117.244,71.145 118.29,72.191 118.29,72.724 R45.1@118.95,73.385 ; 117.658,71.56 ccw(c116.391,72.827) R45.1@118.183,72.827 ; 118.067,71.968 cw(c118.756,71.279) R45.1@118.756,72.254 ; 118.092,71.993 ccw(c117.259,72.827) R45.1@118.437,72.827
NetR46_2: R46.2 R48.2 U7.3 | length 18.5
  Top Layer w0.254: R48.2@93.867,72.25 cw(c93.867,71.269) 94.56,71.962 ; R48.2@93.896,73.41 94.079,73.227 94.079,72.443 95.275,71.247 95.275,69.831 R46.2@95.353,69.753 ; R48.2@94.186,72.823 ccw(c95.358,72.823) 94.529,71.993 ; R48.2@94.44,72.823 ccw(c96.226,72.823) 94.963,71.56 ; R46.2@95.887,70.075 ccw(c96.736,70.923) 96.736,69.723 ; R46.2@95.938,70.311 96.526,69.723 99.972,69.723 101.018,70.769 U7.3@101.17,70.769 ; R46.2@96.067,70.254 ccw(c97.349,71.537) 97.349,69.723 ; R46.2@96.246,69.623 cw(c96.487,69.383) R46.2@96.487,69.723 ; R46.2@96.246,70.434 ccw(c97.962,72.15) 97.962,69.723 ; 100.679,70.43 cw(c101.018,70.09) U7.3@101.018,70.57 ; 100.741,70.492 ccw(c100.49,70.743) U7.3@100.845,70.743
NetR47_2: R47.2 R49.1 U7.5 | length 21.1
  Top Layer w0.254: U7.5@106.618,69.473 107.489,69.473 107.654,69.308 111.421,69.308 111.586,69.473 111.965,69.473 112.244,69.753 112.244,70.057 112.672,70.485 112.672,70.866 113.612,71.806 113.612,72.438 114.173,73 114.173,73.272 R49.1@114.286,73.385 ; U7.5@107.54,69.596 ccw(c108.235,70.291) 108.235,69.308 ; 109.219,69.308 ccw(c109.219,72.82) R47.2@111.703,70.336 ; 109.832,69.308 ccw(c109.832,72.207) R47.2@111.882,70.157 ; 110.446,69.308 ccw(c110.446,71.594) R47.2@112.062,69.977 ; 111.059,69.308 ccw(c111.059,70.98) R47.2@112.242,69.798 ; 113.612,71.916 cw(c114.204,71.916) R49.1@114.191,72.508 ; R49.1@113.612,72.175 cw(c114.198,72.175) R49.1@114.186,72.762
NetR52_2: R52.2 U8.1 | length 7.3
  Top Layer w0.254: U8.1@79.121,59.614 79.197,59.69 79.883,59.69 81.128,58.445 81.483,58.445 ; U8.1@79.773,59.247 cw(c79.773,57.913) 80.716,58.857 ; U8.1@79.773,59.501 cw(c79.773,58.78) U8.1@80.283,59.29 ; U8.1@80.296,59.77 ccw(c81.486,59.77) 80.645,58.928 ; R52.2@81.652,57.95 ccw(c81.064,58.026) 81.483,58.445 ; R52.2@81.945,58.38 cw(c81.758,58.72) 81.483,58.445 ; R52.2@81.966,57.887 81.966,57.963 81.483,58.445
NetR53_2: R53.2 U9.1 | length 10.1
  Top Layer w0.254: U9.1@79.096,53.543 79.35,53.543 80.493,52.4 ; U9.1@79.777,52.693 cw(c79.785,51.692) 80.493,52.4 ; U9.1@80.284,53.107 ccw(c81.037,52.945) 80.493,52.4 ; 80.859,52.4 cw(c80.859,51.347) R53.2@81.846,51.717 ; 81.226,52.4 cw(c81.226,51.484) R53.2@82.084,51.806 ; R53.2@81.593,52.4 cw(c81.593,51.622) R53.2@82.321,51.895 ; R53.2@81.608,51.628 ccw(c80.493,51.209) 80.493,52.4 ; R53.2@82.194,51.841 81.636,52.4 80.493,52.4
NetR55_1: R55.1 R58.1 U9.4 | length 24.2
  Top Layer w0.254: R58.1@57.532,53.949 cw(c57.532,52.172) 58.789,53.428 ; R58.1@57.532,54.203 cw(c57.532,53.039) 58.355,53.862 ; R58.1@57.633,54.508 57.709,54.508 60.046,52.172 63.246,52.172 63.525,52.451 67.564,52.451 ; R58.1@58.105,54.522 ccw(c59.094,54.522) 58.395,53.822 ; 61.299,52.172 ccw(c61.299,54.751) R55.1@63.123,52.927 ; 61.912,52.172 ccw(c61.912,54.138) R55.1@63.302,52.748 ; 62.525,52.172 ccw(c62.525,53.525) R55.1@63.482,52.568 ; R55.1@63.854,52.748 ccw(c64.57,53.464) 64.57,52.451 ; R55.1@64.033,52.117 cw(c64.84,51.31) 64.84,52.451 ; R55.1@64.033,52.927 ccw(c65.183,54.077) 65.183,52.451 ; U9.4@67.795,53.143 cw(c66.987,53.028) 67.564,52.451 ; U9.4@68.258,52.696 ccw(c68.168,51.847) 67.564,52.451 ; U9.4@68.353,53.014 68.127,53.014 67.564,52.451
NetR63_2: R63.2 R65.1 R67.2 | length 15.6
  Top Layer w0.254: R65.1@87.986,67.437 89.129,66.294 89.129,65.872 ; R67.2@88.002,62.357 88.002,62.551 89.459,64.008 89.459,64.795 R63.2@89.56,64.897 ; R67.2@88.002,62.904 ccw(c88.002,63.756) 88.604,63.153 ; R65.1@88.002,66.865 cw(c88.002,65.522) 88.951,66.472 ; R65.1@88.002,67.119 cw(c88.002,66.389) R65.1@88.517,66.905 ; R67.2@88.321,62.331 cw(c89.622,62.331) 88.702,63.251 ; R65.1@88.321,67.438 ccw(c89.131,67.438) R65.1@88.558,66.865 ; R67.2@88.575,62.331 cw(c90.489,62.331) 89.135,63.685 ; R65.1@88.575,67.438 ccw(c89.998,67.438) 88.992,66.431 ; R63.2@89.456,64.99 ccw(c88.332,65.075) 89.129,65.872 ; R63.2@89.52,65.48 cw(c89.06,65.02) R63.2@89.709,64.971 ; R63.2@90.011,65.52 cw(c89.979,66.722) 89.129,65.872 ; R63.2@90.027,64.973 89.129,65.872
NetR64_2: R64.2 R66.1 R68.1 | length 13.2
  Top Layer w0.254: R68.1@114.159,63.022 117.248,63.022 117.248,63.987 118.112,64.85 118.112,65.231 R66.1@118.671,65.79 ; R68.1@114.384,62.796 cw(c114.929,62.251) 114.929,63.022 cw(c114.929,63.792) R68.1@114.384,63.247 ; R68.1@114.564,62.616 cw(c115.542,61.638) 115.542,63.022 cw(c115.542,64.405) R68.1@114.564,63.427 ; 115.237,63.022 ccw(c115.237,64.489) R64.2@116.275,63.451 ; 115.356,63.022 cw(c115.356,61.722) R64.2@116.275,62.641 ; 115.85,63.022 ccw(c115.85,63.876) R64.2@116.454,63.272 ; 115.969,63.022 cw(c115.969,62.335) R64.2@116.454,62.821
NetR67_1: R67.1 R69.1 U10.2 | length 25
  Top Layer w0.254: R67.1@90.002,61.658 cw(c90.002,59.97) 91.195,61.163 ; R67.1@90.002,61.912 cw(c90.002,60.837) 90.762,61.597 ; R67.1@90.002,62.357 91.5,60.858 98.374,60.858 ; R67.1@90.575,62.231 ccw(c91.653,62.231) 90.891,61.468 ; 98.616,61.1 cw(c99.349,60.368) R69.1@99.349,61.404 ; 98.768,61.252 ccw(c98.129,61.891) R69.1@99.031,61.954 ; R69.1@98.777,61.937 cw(c97.393,61.84) 98.374,60.858 ; R69.1@99.109,62.597 ccw(c98.668,63.555) 99.722,63.555 ; R69.1@99.138,62.209 99.722,62.793 ; R69.1@99.189,62.082 R69.1@99.189,62.209 ; R69.1@99.215,62.367 ccw(c98.85,63.158) 99.722,63.158 ; R69.1@99.322,62.136 ccw(c99.033,62.762) R69.1@99.722,62.762 ; R69.1@99.363,62.65 ccw(c99.376,63.139) 99.722,62.793 ; R69.1@99.492,61.976 98.374,60.858 ; 100.874,64.707 cw(c101.17,64.411) U10.2@101.17,64.83 ; 100.875,64.708 ccw(c100.581,65.003) U10.2@100.997,65.003 ; U10.2@101.97,65.003 101.17,65.003 99.722,63.555 ; 99.722,62.793 99.722,63.555
NetR68_2: R68.2 R70.1 U10.6 | length 21.6
  Top Layer w0.254: U10.6@106.77,63.733 107.539,63.733 108.682,62.59 R68.2@112.168,62.59 ; U10.6@107.57,63.56 cw(c107.57,63.217) 107.813,63.459 ; U10.6@107.743,63.733 ccw(c108.236,63.733) 107.888,63.385 ; 109.854,62.59 ccw(c109.854,65.277) R68.2@111.754,63.377 ; 110.467,62.59 ccw(c110.467,64.663) R68.2@111.933,63.197 ; 111.08,62.59 ccw(c111.08,64.05) R68.2@112.113,63.018 ; R68.2@112.159,63.022 112.727,63.022 112.727,63.885 ; R68.2@112.478,63.072 cw(c113.84,63.072) 112.877,64.035 ; R68.2@112.656,63.356 cw(c113.038,63.574) 112.727,63.885 ; R68.2@112.732,63.072 cw(c114.708,63.072) 113.31,64.469 ; 113.591,64.86 cw(c114.177,64.86) R70.1@114.165,65.447 ; R70.1@113.591,65.119 cw(c114.172,65.119) R70.1@114.16,65.701 ; R70.1@114.099,65.841 113.591,65.333 113.591,64.749 112.727,63.885 ; R68.2@112.159,63.645 ccw(c112.159,64.435) 112.718,63.876 cw(c112.159,64.435) R68.2@112.159,63.645
NetR73_1: R73.1 U11.1 | length 17.8
  Top Layer w0.254: U11.1@79.958,46.467 cw(c80.353,46.053) 80.478,46.611 ; U11.1@79.963,46.472 cw(c80.539,45.896) 80.539,46.711 ; U11.1@80.006,46.797 ccw(c80.696,47.195) 80.49,46.426 ; U11.1@80.033,46.711 cw(c80.033,44.064) R73.1@81.917,45.923 ; U11.1@80.034,46.209 cw(c80.592,45.243) 80.881,46.321 ; U11.1@80.133,46.283 cw(c80.748,45.637) 80.942,46.508 ; U11.1@80.143,46.292 cw(c81.152,45.283) 81.152,46.711 ; U11.1@80.143,47.032 ccw(c80.919,47.808) 80.919,46.711 ; U11.1@80.214,46.943 ccw(c80.981,47.43) 80.783,46.543 ; U11.1@80.226,46.924 ccw(c81.447,47.629) 81.082,46.267 ; 80.641,46.711 cw(c80.641,44.663) R73.1@82.098,46.101 ; 81.248,46.711 cw(c81.248,45.262) R73.1@82.279,46.279 ; R73.1@81.736,45.744 ccw(c79.426,43.465) 79.426,46.711 81.712,46.711 R73.1@82.22,46.203
NetR74_2: R74.2 U12.1 | length 13.3
  Top Layer w0.254: U12.1@79.146,40.107 79.604,40.564 81.991,40.564 R74.2@82.194,40.361 ; U12.1@79.596,40.269 cw(c80.264,39.66) U12.1@80.264,40.564 ; U12.1@79.784,40.098 cw(c80.839,39.134) 80.839,40.564 ; U12.1@79.971,39.927 cw(c81.415,38.609) 81.415,40.564 ; U12.1@80.118,40.564 cw(c80.118,38.271) R74.2@81.739,39.892 ; U12.1@80.159,39.756 cw(c81.991,38.083) R74.2@81.991,40.564 ; 80.731,40.564 cw(c80.731,38.884) R74.2@81.919,40.072 ; 81.344,40.564 cw(c81.344,39.497) R74.2@82.098,40.251 ; 81.404,40.564 ccw(c81.404,41.038) R74.2@81.739,40.703
NetR85_2: R85.2 R87.1 R89.2 | length 18.6
  Top Layer w0.254: R87.1@91.527,58.678 91.948,58.258 91.948,55.933 91.62,55.605 R89.2@94.083,55.605 ; R87.1@91.603,58.041 cw(c90.77,57.208) 91.948,57.208 ; R85.2@91.654,56.107 ccw(c90.944,56.817) 91.948,56.817 ; 91.948,56.74 ccw(c93.097,56.74) R85.2@92.285,55.927 ; 91.948,56.918 cw(c93.537,56.918) R87.1@92.413,58.041 ; 91.948,57.353 ccw(c93.71,57.353) R85.2@92.464,56.107 ; 91.948,57.531 cw(c92.924,57.531) R87.1@92.234,58.221 ; R85.2@92.285,55.376 cw(c92.837,54.823) 92.837,55.605 ; R85.2@92.285,55.827 ccw(c92.821,56.363) 92.821,55.605 ; R85.2@92.464,55.196 cw(c93.451,54.21) 93.451,55.605 ; R85.2@92.464,56.007 ccw(c93.434,56.977) 93.434,55.605 ; 93.036,55.605 cw(c93.036,54.21) R89.2@94.023,55.196 ; 93.053,55.605 ccw(c93.053,56.977) R89.2@94.023,56.007 ; 93.649,55.605 cw(c93.649,54.823) R89.2@94.202,55.376 ; 93.666,55.605 ccw(c93.666,56.363) R89.2@94.202,55.827
NetR86_2: R86.2 R88.1 R90.1 | length 13.3
  Top Layer w0.254: R90.1@114.022,55.783 114.073,55.833 R86.2@116.629,55.833 117.197,55.833 117.197,56.773 118.061,57.637 118.061,58.059 R88.1@118.629,58.627 ; R90.1@114.283,55.608 cw(c114.827,55.063) 114.827,55.833 cw(c114.827,56.604) R90.1@114.283,56.059 ; R90.1@114.462,55.428 cw(c115.441,54.45) 115.441,55.833 cw(c115.441,57.217) R90.1@114.462,56.239 ; R86.2@116.224,55.428 ccw(c115.246,54.45) 115.246,55.833 ccw(c115.246,57.217) R86.2@116.224,56.239 ; R86.2@116.404,55.608 ccw(c115.859,55.063) 115.859,55.833 ccw(c115.859,56.604) R86.2@116.404,56.059
NetR89_1: R89.1 R91.1 U13.2 | length 20.8
  Top Layer w0.254: R91.1@94.21,58.856 94.818,58.248 94.818,57.461 95.987,56.292 95.987,56.007 96.215,56.007 96.876,55.347 99.771,55.347 100.45,56.025 100.45,57.094 101.246,57.891 U13.2@101.97,57.891 ; R91.1@94.358,57.875 cw(c94.318,57.377) 94.818,57.377 ; R91.1@94.377,58.128 cw(c94.34,57.651) 94.818,57.651 ; 95.344,56.935 cw(c94.11,55.701) R89.1@95.855,55.701 ; 95.705,56.574 ccw(c96.428,57.296) R89.1@96.428,56.274 ; 95.777,56.502 cw(c94.977,55.701) R89.1@96.109,55.701 ; R89.1@96.474,55.647 ccw(c97.2,56.373) 97.2,55.347 ; R89.1@96.653,55.827 ccw(c97.813,56.987) 97.813,55.347 ; R89.1@96.833,55.196 cw(c97.196,54.833) 97.196,55.347 ; R89.1@96.833,56.007 ccw(c98.426,57.6) 98.426,55.347 ; 100.821,57.466 ccw(c100.397,57.891) U13.2@100.997,57.891
NetR90_2: R90.2 R92.1 U13.6 | length 17.3
  Top Layer w0.254: U13.6@107.57,56.448 cw(c107.57,56.029) 107.866,56.325 ; U13.6@107.571,56.646 107.571,56.621 108.917,55.275 112.625,55.275 112.625,56.773 113.54,57.688 113.54,58.323 113.895,58.678 R92.1@114.099,58.678 ; U13.6@107.743,56.621 ccw(c108.16,56.621) 107.865,56.326 ; 109.446,55.275 ccw(c109.446,58.395) R90.2@111.652,56.189 ; 110.059,55.275 ccw(c110.059,57.782) R90.2@111.832,56.009 ; 110.672,55.275 ccw(c110.672,57.169) R90.2@112.011,55.829 ; 111.285,55.275 ccw(c111.285,56.555) R90.2@112.191,55.65
NetR95_2: R95.2 U14.1 | length 15.3
  Top Layer w0.254: U14.1@79.121,33.553 79.832,33.553 U14.1@80.34,34.061 ; U14.1@79.586,33.703 cw(c80.33,33.109) U14.1@80.33,34.061 ; U14.1@79.785,33.545 cw(c80.859,32.686) 80.859,34.061 ; U14.1@79.786,33.546 cw(c80.862,32.892) 80.564,34.116 ; U14.1@79.983,33.386 cw(c81.387,32.264) 81.387,34.061 ; U14.1@80.003,33.414 cw(c81.603,32.441) 81.16,34.261 ; U14.1@80.181,33.228 cw(c81.915,31.842) R95.2@81.915,34.061 ; 80.886,34.061 ccw(c80.886,35.387) R95.2@81.9,34.534 ; 81.406,34.061 cw(c81.406,33.59) R95.2@81.739,33.923 ; 81.431,34.061 ccw(c81.431,34.928) R95.2@82.095,34.37 ; R95.2@81.706,34.697 cw(c80.34,35.846) U14.1@80.34,34.061 ; R95.2@82.169,34.315 81.915,34.061 U14.1@80.34,34.061
NetR96_2: R96.2 U15.1 | length 9.8
  Top Layer w0.254: U15.1@79.197,27.102 79.248,27.051 80.01,27.051 81.966,29.007 R96.2@82.144,29.007 ; U15.1@79.773,27.269 ccw(c79.773,28.369) 80.55,27.591 ; U15.1@79.773,27.523 ccw(c79.773,29.236) 80.984,28.025 ; U15.1@80.296,27 cw(c81.108,27) 80.534,27.575 ; 80.783,27.824 cw(c82.094,26.514) R96.2@82.094,28.367 ; 81.217,28.258 cw(c82.094,27.381) R96.2@82.094,28.621 ; 81.253,28.294 ccw(c80.607,28.94) R96.2@81.521,28.94
NetR105_2: R105.2 U16.1 | length 13.6
  Top Layer w0.254: v1(65.075,58.395) 65.03,58.395 65.026,58.399 66.823,58.399 v1@66.952,58.27 ; v1@65.197,58.272 cw(c65.503,57.967) 65.503,58.399 ; v1@65.197,58.517 ccw(c65.482,58.802) 65.482,58.399 ; 66.45,58.399 cw(c66.45,57.967) v1@66.756,58.272 ; 66.471,58.399 ccw(c66.471,58.802) v1@66.756,58.517
  Bottom Layer w0.254: R105.2@63.984,58.796 R105.2@64.204,58.577 ; R105.2@64.035,58.399 v1@65.071,58.399 ; R105.2@64.503,58.694 ccw(c65.071,59.092) v1@65.071,58.399 ; R105.2@64.535,58.084 cw(c65.071,57.785) v1@65.071,58.399 ; R105.2@64.647,58.399 cw(c64.647,57.967) v1@64.952,58.272 ; R105.2@64.667,58.399 ccw(c64.667,58.802) v1@64.952,58.517 ; v1@64.911,58.449 cw(c64.72,58.513) 64.772,58.319 cw(c64.821,58.136) v1@64.954,58.271 ; v1@64.917,58.324 ccw(c64.641,58.201) 64.719,58.493 ccw(c64.8,58.795) v1@64.977,58.537 ; v1(65.075,58.395) v1@65.071,58.399 ; v1@66.965,58.544 ccw(c67.132,58.834) 67.218,58.511 ; v1@67.001,58.272 cw(c67.357,57.916) 67.357,58.42 ; v1@67.001,58.517 ccw(c67.235,58.751) 67.235,58.42 ; v1@67.028,58.308 cw(c67.462,58.057) 67.332,58.542 ; 67.245,58.42 ccw(c67.245,59.237) U16.1@68.01,58.95 ; 67.611,58.42 ccw(c67.611,59.1) U16.1@68.248,58.861 ; U16.1@67.772,59.04 cw(c66.878,59.375) 66.878,58.42 68.078,58.42 68.099,58.399 68.15,58.399 U16.1@68.15,58.856
  other v1: 66.878,58.395
NetR106_2: R106.2 U17.1 | length 13.4
  Top Layer w0.254: v1@65.075,53.442 v1@67.081,53.442 ; v1@65.223,53.294 cw(c65.579,52.937) 65.579,53.442 ; v1@65.223,53.539 ccw(c65.457,53.773) 65.457,53.442 ; v1@66.934,53.319 ccw(c66.638,53.024) 66.638,53.442 ccw(c66.638,53.859) v1@66.934,53.564
  Bottom Layer w0.254: R106.2@63.957,53.238 64.341,53.238 64.518,53.416 v1@65.049,53.416 ; R106.2@63.959,53.166 R106.2@64.133,53.34 ; R106.2@63.984,53.208 R106.2@63.992,53.2 ; R106.2@64.343,53.126 cw(c64.719,53.027) R106.2@64.719,53.416 ; R106.2@64.44,53.613 ccw(c64.915,54.088) v1@64.915,53.416 ; R106.2@64.588,53.061 cw(c65.049,52.939) v1@65.049,53.416 ; R106.2@64.659,53.485 ccw(c64.758,53.855) v1@64.994,53.553 ; 64.796,53.448 cw(c64.731,53.203) v1@64.95,53.33 ; v1@64.978,53.294 ccw(c64.683,52.999) 64.683,53.416 ccw(c64.683,53.834) v1@64.978,53.539 ; v1@65.075,53.416 v1(65.1,53.416) ; v1@65.075,53.442 v1@65.049,53.416 ; v1@67.144,53.292 cw(c67.35,52.941) 67.455,53.335 cw(c67.561,53.728) v1@67.206,53.527 ; v1@67.178,53.319 cw(c67.474,53.024) 67.474,53.442 cw(c67.474,53.859) v1@67.178,53.564 ; 67.448,53.442 cw(c67.448,52.819) U17.1@68.016,53.073 ; U17.1@67.623,53.442 ccw(c67.623,53.822) U17.1@67.892,53.553 ; U17.1@67.785,52.97 ccw(c67.056,52.643) v1(67.056,53.442) 68.377,53.442 68.779,53.039 U17.1@68.15,53.039
NetR110_2: R110.2 R112.1 R114.2 | length 15.2
  Bottom Layer w0.254: R114.2@88.925,37.329 cw(c88.889,36.708) 89.511,36.708 ; R114.2@88.927,37.774 89.511,37.19 89.511,36.58 90.375,35.717 90.375,34.65 R112.1@93.261,34.65 ; R114.2@88.939,37.583 cw(c88.904,36.977) R114.2@89.511,36.977 ; R110.2@91.169,34.424 cw(c91.713,33.88) 91.713,34.65 cw(c91.713,35.42) R110.2@91.169,34.875 ; R110.2@91.348,34.245 cw(c92.327,33.266) 92.327,34.65 cw(c92.327,36.033) R110.2@91.348,35.055 ; R112.1@92.856,34.245 ccw(c91.878,33.266) 91.878,34.65 ccw(c91.878,36.033) R112.1@92.856,35.055 ; R112.1@93.036,34.424 ccw(c92.491,33.88) 92.491,34.65 ccw(c92.491,35.42) R112.1@93.036,34.875
NetR111_2: R111.2 R113.1 R115.2 | length 18.9
  Bottom Layer w0.254: R115.2@89.121,49.548 ccw(c89.121,50.651) 89.901,49.871 ; R115.2@89.156,48.925 89.156,49.125 90.175,50.145 ; R115.2@89.44,48.976 cw(c90.478,48.98) 89.744,49.714 ; R115.2@89.694,48.977 cw(c91.337,48.983) 90.175,50.145 ; 90.653,50.544 cw(c91.513,50.544) R111.2@91.278,51.371 ; 90.653,50.88 cw(c91.417,50.88) R111.2@91.208,51.616 ; 90.653,51.216 cw(c91.322,51.216) R111.2@91.139,51.86 ; R111.2@91.112,51.973 R111.2@91.121,51.973 ; R111.2@91.347,51.747 cw(c91.891,51.202) 91.891,51.973 cw(c91.891,52.743) R111.2@91.347,52.198 ; R111.2@91.526,51.567 cw(c92.504,50.589) 92.504,51.973 cw(c92.504,53.356) R111.2@91.526,52.378 ; R113.1@93.034,51.567 ccw(c92.056,50.589) 92.056,51.973 ccw(c92.056,53.356) R113.1@93.034,52.378 ; R113.1@93.213,51.747 ccw(c92.669,51.202) 92.669,51.973 ccw(c92.669,52.743) R113.1@93.213,52.198 ; R113.1@93.439,51.973 R111.2@91.121,51.973 ; 90.175,50.145 90.175,50.149 90.653,50.626 90.653,51.31 91.121,51.779 R111.2@91.121,51.973
NetR114_1: R114.1 R116.1 U18.3 | length 22.4
  Bottom Layer w0.254: U18.3@90.075,40.268 cw(c89.35,39.544) 90.375,39.544 ; U18.3@90.098,40.249 cw(c89.48,39.36) 90.546,39.551 ; U18.3@90.223,41.152 90.375,41 90.375,38.282 90.959,37.698 R116.1@93.261,37.698 ; U18.3@90.243,40.457 cw(c89.975,40.071) 90.438,40.155 ; 90.375,38.663 ccw(c91.859,38.663) R114.1@90.81,37.614 ; 90.375,39.276 ccw(c92.472,39.276) R114.1@90.989,37.794 ; 90.375,39.89 ccw(c93.085,39.89) R114.1@91.169,37.973 ; U18.3@90.375,40.503 ccw(c93.698,40.503) R114.1@91.348,38.153 ; R114.1@91.169,37.472 cw(c91.713,36.928) 91.713,37.698 cw(c91.713,38.468) R114.1@91.169,37.923 ; R114.1@91.348,37.293 cw(c92.327,36.314) 92.327,37.698 cw(c92.327,39.081) R114.1@91.348,38.103 ; R116.1@92.856,37.293 ccw(c91.878,36.314) 91.878,37.698 ccw(c91.878,39.081) R116.1@92.856,38.103 ; R116.1@93.036,37.472 ccw(c92.491,36.928) 92.491,37.698 ccw(c92.491,38.468) R116.1@93.036,37.923
NetR115_1: R115.1 R117.1 U18.6 | length 19.7
  Bottom Layer w0.254: U18.6@90.075,46.913 ccw(c89.78,47.208) 90.197,47.208 ccw(c90.615,47.208) U18.6@90.32,46.913 ; U18.6@90.197,45.991 90.197,47.782 ; 90.432,48.016 cw(c91.121,47.327) R115.1@91.121,48.302 ; R115.1@90.552,48.807 cw(c89.32,48.659) 90.197,47.782 ; 90.567,48.151 ccw(c89.98,48.738) R115.1@90.804,48.837 ; R115.1@91.121,49.548 ccw(c91.121,50.538) 91.822,49.838 ; R115.1@91.44,48.975 cw(c92.603,48.975) 91.781,49.797 ; R115.1@91.694,48.975 cw(c93.47,48.975) 92.214,50.23 ; 95.023,49.738 ccw(c95.804,49.738) R117.1@95.467,49.033 ; 95.023,50.141 ccw(c95.997,50.141) R117.1@95.577,49.262 ; R117.1@95.455,48.925 95.455,49.122 95.023,49.554 95.023,50.545 ; R117.1@95.686,49.491 cw(c96.19,50.545) 95.023,50.545 ; 90.197,47.782 91.213,48.798 91.213,49.229 92.834,50.851 94.717,50.851 95.023,50.545
NetR124_2: R124.2 U19.1 | length 13.9
  Top Layer w0.254: v1(65.075,48.133) 65.13,48.188 66.569,48.188 ; v1@65.197,48.011 cw(c65.625,47.583) 65.625,48.188 ; 66.644,48.113 ccw(c66.853,48.322) v1@66.853,48.027 ; v1@66.681,47.872 ccw(c66.295,47.913) 66.569,48.188 ; v1@66.878,47.879 66.569,48.188
  Bottom Layer w0.254: R124.2@63.857,47.899 64.061,47.696 64.056,47.701 64.518,48.163 65.153,48.163 ccw(c65.153,47.617) R124.2@64.607,47.618 ; R124.2@64.099,47.62 cw(c64.644,47.618) R124.2@64.644,48.163 ; R124.2@64.353,47.619 cw(c64.898,47.618) v1@64.898,48.163 ; R124.2@64.586,48.163 cw(c64.586,47.644) v1@64.952,48.011 ; R124.2@64.729,48.163 ccw(c64.729,48.479) v1@64.952,48.255 ; 64.75,48.123 cw(c64.79,47.975) v1@64.923,48.049 ; v1@66.939,47.704 cw(c67.148,47.342) 67.256,47.746 cw(c67.364,48.149) v1@67.003,47.94 ; v1@66.975,47.731 cw(c67.27,47.436) 67.27,47.854 cw(c67.27,48.271) v1@66.975,47.976 ; 67.266,47.854 cw(c67.266,47.006) U19.1@68.022,47.389 ; U19.1@67.68,47.854 cw(c67.68,47.216) U19.1@68.249,47.504 ; U19.1@67.795,47.274 ccw(c66.853,46.797) v1(66.853,47.854) 67.866,47.854 67.998,47.985 68.023,47.985 68.15,47.858 U19.1@68.15,47.511
NetR125_2: R125.2 U20.1 | length 12.5
  Top Layer w0.254: v1@65.024,37.139 65.452,37.139 ; v1@65.049,36.987 cw(c65.049,35.65) 65.995,36.595 ; v1@65.049,37.241 cw(c65.049,36.517) 65.562,37.029 ; v1@65.172,37.038 cw(c65.416,36.794) 65.416,37.139 ; v1@65.185,37.268 ccw(c65.452,37.48) 65.452,37.139 ; 66.425,36.275 cw(c66.425,35.843) v1@66.73,36.149 ; 66.445,36.275 ccw(c66.445,36.679) v1@66.73,36.394 ; v1@66.878,36.275 66.315,36.275 65.452,37.139
  Bottom Layer w0.254: R125.2@64.008,36.728 64.44,37.16 v1(65.049,37.16) ; v1@64.927,37.038 ccw(c64.632,36.743) 64.632,37.16 ccw(c64.632,37.578) v1@64.927,37.283 ; v1@66.939,36.121 cw(c67.139,35.775) 67.243,36.161 ; v1@66.975,36.149 cw(c67.26,35.864) 67.26,36.267 ; v1@66.975,36.394 ccw(c67.281,36.699) 67.281,36.267 ; v1@67.003,36.358 ccw(c67.38,36.575) 67.267,36.155 ; 67.245,36.267 ccw(c67.245,37.183) U20.1@67.892,36.535 ; 67.423,36.267 cw(c67.423,35.402) U20.1@68.063,35.984 ; U20.1@67.875,35.813 ccw(c66.849,34.878) 66.849,36.267 U20.1@68.506,36.267
  other v1: 66.853,36.271
NetR129_2: R129.2 U21.1 | length 16.4
  Top Layer w0.254: v1(65.126,40.869) v1@66.777,40.869 ; v1@65.248,40.746 cw(c65.543,40.451) 65.543,40.869 cw(c65.543,41.286) v1@65.248,40.991 ; v1@66.68,40.746 ccw(c66.384,40.451) 66.384,40.869 ccw(c66.384,41.286) v1@66.68,40.991
  Bottom Layer w0.254: R129.2@63.984,42.016 v1@65.129,40.872 ; R129.2@64.034,41.459 cw(c64.034,40.235) 64.9,41.1 ; R129.2@64.353,42.032 ccw(c65.283,42.032) R129.2@64.626,41.375 ; 64.432,41.329 cw(c64.063,40.42) v1@64.966,40.801 ; R129.2@64.607,42.032 ccw(c66.15,42.032) v1@65.059,40.941 ; 64.826,41.174 cw(c64.52,40.869) v1@64.953,40.869 ; 64.841,41.16 ccw(c65.126,41.445) v1@65.126,41.042 ; 64.873,41.264 ccw(c65.297,41.509) v1@65.17,41.036 ; 64.924,41.175 cw(c64.625,41.003) v1@64.958,40.913 ; v1@66.802,40.788 ccw(c66.802,41.512) 67.314,41 ; v1(66.802,40.869) 67.183,40.869 ; v1@66.802,41.042 ccw(c66.802,42.379) U21.1@67.748,41.433 ; v1@66.932,40.755 cw(c67.183,40.536) 67.183,40.869 ; v1@66.932,40.982 ccw(c67.183,41.202) 67.183,40.869 ; 67.447,41.132 ccw(c66.741,41.838) U21.1@67.739,41.838 ; U21.1@67.616,41.302 cw(c68.261,40.657) U21.1@68.262,41.569 ; U21.1@68.175,42.037 68.023,41.885 68.023,41.709 67.183,40.869 ; U21.1@68.262,41.315 ccw(c68.261,39.791) 67.183,40.869
NetR132_2: R132.2 U22.1 | length 15
  Top Layer w0.254: v1@65.989,31.648 v1(67.92,31.648) ; v1@66.162,31.501 cw(c66.519,31.144) 66.519,31.648 ; v1@66.162,31.745 ccw(c66.396,31.979) 66.396,31.648 ; v1@67.797,31.526 ccw(c67.502,31.231) 67.502,31.648 ccw(c67.502,32.066) v1@67.797,31.771
  Bottom Layer w0.254: R132.2@64.082,31.319 cw(c64.858,30.583) 64.858,31.653 ; R132.2@64.266,31.144 cw(c65.449,30.022) 65.449,31.653 ; R132.2@64.365,31.653 66.04,31.653 ccw(c66.04,29.461) R132.2@64.45,30.969 ; R132.2@64.44,31.769 ccw(c64.721,32.05) R132.2@64.721,31.653 ; 65.551,31.653 cw(c65.551,31.134) v1@65.918,31.501 ; 65.561,31.533 cw(c65.686,31.032) v1@65.951,31.475 ; 65.694,31.653 ccw(c65.694,31.969) v1@65.918,31.745 ; 65.695,31.566 ccw(c65.618,31.876) v1@65.892,31.712 ; v1@67.797,31.526 cw(c67.505,31.234) 67.918,31.234 ; v1@67.853,31.489 cw(c67.749,31.24) 68.009,31.31 cw(c68.266,31.379) v1@68.056,31.542 ; 67.918,31.228 cw(c68.34,31.228) v1@68.042,31.526 ; 67.918,31.31 ccw(c68.5,31.31) U22.1@68.337,30.751 ; U22.1@68.409,30.995 cw(c68.599,31.648) v1(67.92,31.648) 67.918,30.938 68.478,30.378 U22.1@68.732,30.378
  other v1: 66.04,31.623